# EAGLE board Enclosure.Back (EAGLE 7.6.0)

Size 60 x 22.7 mm. Coordinates in mm from the lower left corner, seen from the top.
Outline: 0,0 60,0 60,22.7 0,22.7 0,0
Outline: 20,16 40,16 40,7 20,7 20,16
Copper layers (1*16): Top 0.035mm / dielectric 1.5mm / Bottom 0.035mm
Design rules "default": minimum track width 10mil, minimum drill 24mil, track to track 8mil, track to pad 8mil, pad to pad 8mil, via to via 8mil, smd to smd 8mil, copper to edge 40mil, drill to drill 8mil, minimum pad ring 10mil, minimum via ring 8mil, stop-mask expansion 4mil, vias tented up to drill 0mil, thermal gap 10mil

## Footprints (pad centres in the part's own frame; a part is rotated, then mirrored left to right if it is on the bottom)
1X01 = drill 1.016 pad 1.93 octagon: 1 0,0
R0805 = smd 1.1 x 1.4: 1 -1,0; 2 1,0

## Placement (x,y rotation side)
JP1  [1X01]  58.7,21.4 0 top
R1  [R0805]  57.7,1.3 0 top
R2  [R0805]  6,5 0 bottom

## Library data of the parts
JP1 R1 R2 = adafruit

## Text on the board
Dimension: CUT OUT